# EAGLE board board (EAGLE 9.7.0)
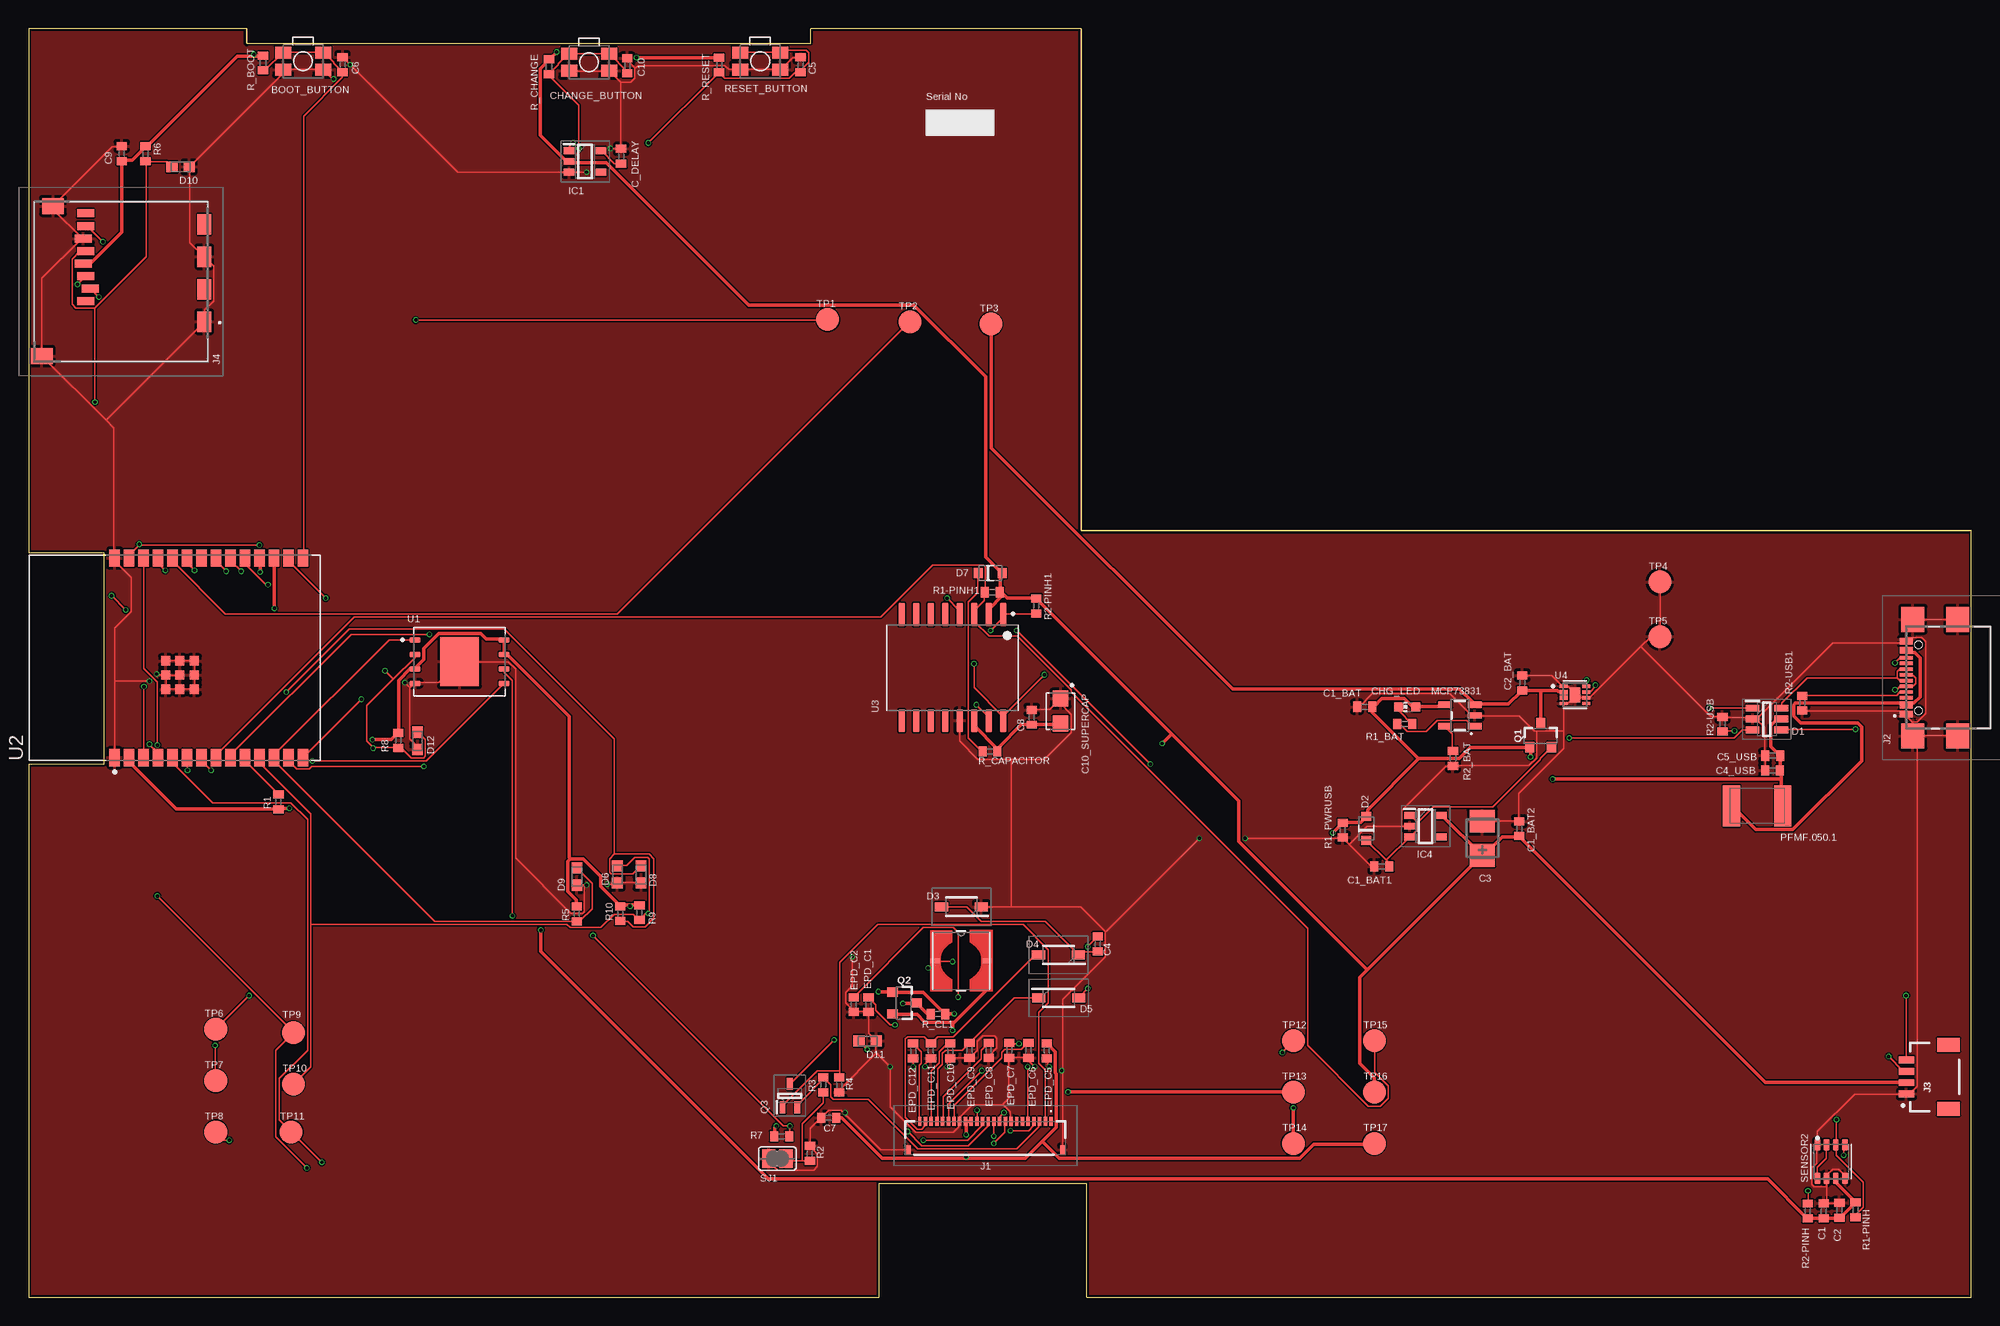
[diagram p0: board, top side]
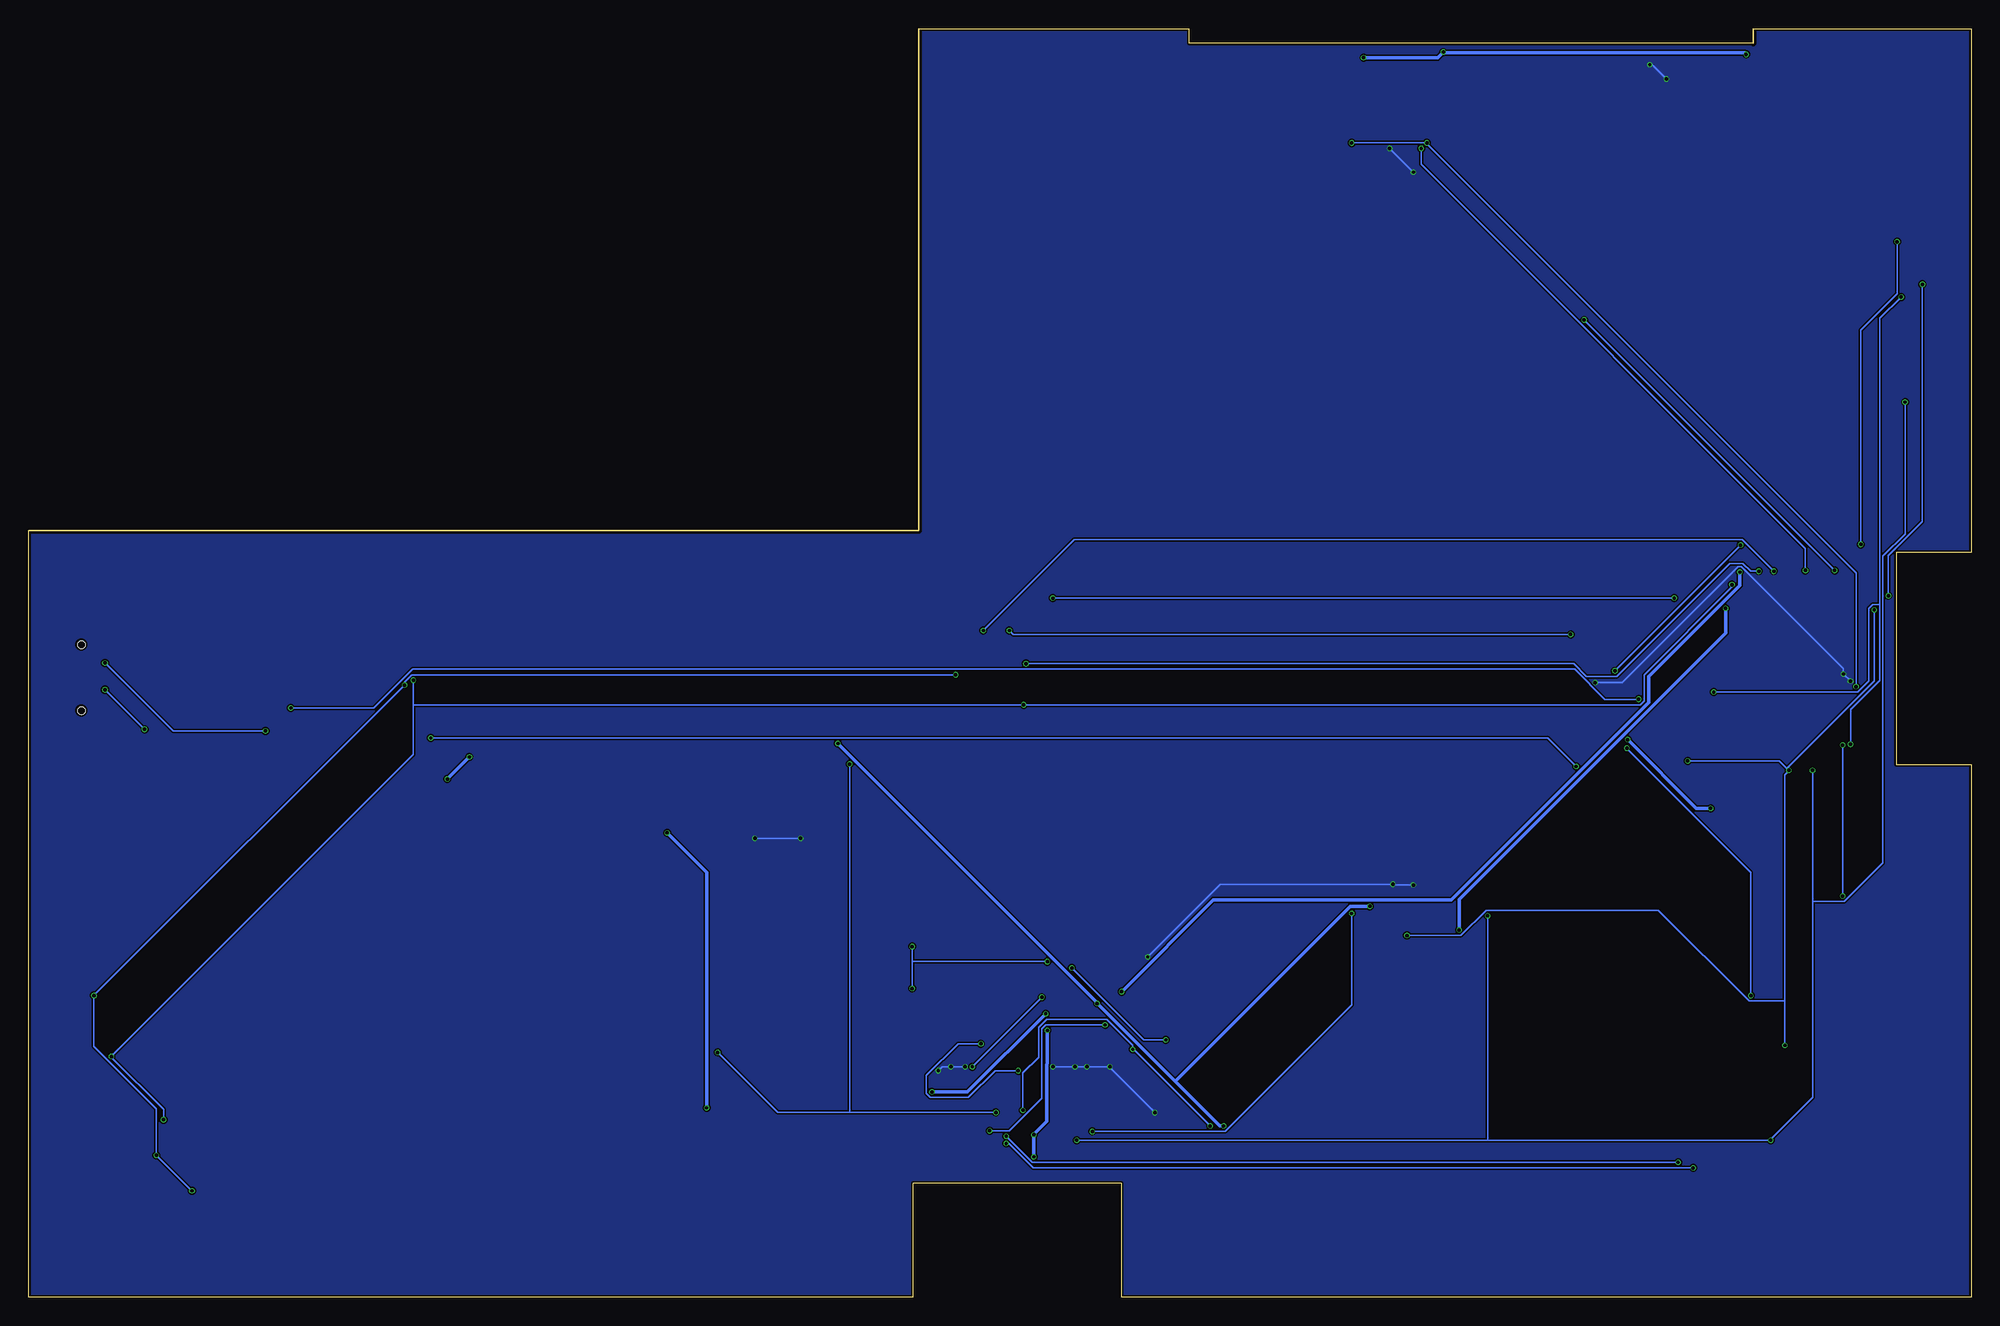
[diagram p1: board, bottom side, seen from below]

Size 170.2 x 111.2 mm. Coordinates in mm from the lower left corner, seen from the top.
Outline: 0,0 74.46,0 74.46,10 92.7,10 92.7,0 170.2,0 170.2,67.2 92.2,67.2 92.2,111.2 68.5,111.2 68.5,109.9 19.1,109.9 19.1,111.2 0,111.2 0,65.3 6.6,65.3 6.6,46.7 0,46.7 0,0
Copper layers (1*16): Top 0.035mm / dielectric 1.6mm / Bottom 0.035mm
Design rules "jlcpcb-2layers.dru *": minimum track width 0.15mm, minimum drill 0.3mm, track to track 5mil, track to pad 5mil, pad to pad 5mil, via to via 5mil, smd to smd 5mil, copper to edge 0.2mm, drill to drill 6mil, minimum pad ring 10mil, minimum via ring 3mil, stop-mask expansion 4mil, vias tented up to drill 0mil, thermal gap 10mil
Net classes: 1 netclass2: width 0.3 mm

## Footprints (pad centres in the part's own frame; a part is rotated, then mirrored left to right if it is on the bottom)
MYBUTTON = smd 1.4 x 1.05: 1 1.75,0.75; 2 -1.75,0.75; 3 -1.75,-0.75; 4 1.75,-0.75
ESP32_WROVER_EAGLE-LTSPICE_C0402 = smd 0.7 x 0.9: 1 -0.65,0; 2 0.65,0
EAGLE-LTSPICE_C0402 = smd 0.7 x 0.9: 1 -0.65,0; 2 0.65,0
RCL_CT3528 = smd 2 x 2.2: + -1.5,0; - 1.5,0
CAPCP3225X100N = smd 1.4 x 1.4: 1 -1.1,0; 2 1.1,0
ADAFRUIT_CHIP-LED0603 = smd 0.8 x 0.8: A 0,-0.75; C 0,0.75
SOT95P280X145-6N = smd 1.2 x 0.6: 1 -1.25,0.95; 2 -1.25,0; 3 -1.25,-0.95; 4 1.25,-0.95; 5 1.25,0; 6 1.25,0.95
ESP32_WROVER_AVX---SD0805S020S1R0_AVX_SD0805S020S1R0_0 = smd 0.8 x 0.9: 1 -1.05,0; 2 1.05,0
SOD3716X135N = smd 1.15 x 0.8: 1 -1.75,0; 2 1.75,0
DIOC1608X36N = smd 0.97 x 0.94: 1 -0.75,0; 2 0.75,0
SOT95P280X125-5N = smd 0.9 x 0.6: 1 -1.4,0.95; 2 -1.4,0; 3 -1.4,-0.95; 4 1.4,-0.95; 5 1.4,0.95
SOT95P280X120-5N = smd 0.9 x 0.6: 1 -1.4,0.95; 2 -1.4,0; 3 -1.4,-0.95; 4 1.4,-0.95; 5 1.4,0.95
FH34SRJ24S05SH99 = smd 0.3 x 0.8: 1 5.75,1.45; 2 5.25,1.45; 3 4.75,1.45; 4 4.25,1.45; 5 3.75,1.45; 6 3.25,1.45; 7 2.75,1.45; 8 2.25,1.45; 9 1.75,1.45; 10 1.25,1.45; 11 0.75,1.45; 12 0.25,1.45; 13 -0.25,1.45; 14 -0.75,1.45; 15 -1.25,1.45; 16 -1.75,1.45; 17 -2.25,1.45; 18 -2.75,1.45; 19 -3.25,1.45; 20 -3.75,1.45; 21 -4.25,1.45; 22 -4.75,1.45; 23 -5.25,1.45; 24 -5.75,1.45 | smd 0.4 x 0.8: MP1 6.75,-1.05; MP2 -6.75,-1.05
SAMACSYS_PARTS_USB4110GFA = smd 0.3 x 1.15: A1 -3.35,3.678; A4 -2.55,3.678; A5 -1.25,3.678; A6 -0.25,3.678; A7 0.25,3.678; A8 1.25,3.678; A9 2.55,3.678; A12 3.35,3.678; B1 3.05,3.678; B4 2.25,3.678; B5 1.75,3.678; B6 0.75,3.678; B7 -0.75,3.678; B8 -1.75,3.678; B9 -2.25,3.678; B12 -3.05,3.678 | smd 2.18 x 2: MP1 -5.11,-0.827; MP2 5.11,-0.827; MP3 -5.11,3.103; MP4 5.11,3.103 | hole 0.65: -2.89,2.603; 2.89,2.603
JST04_1MM_RA = smd 0.6 x 1.35: 1 -1.5,0; 2 -0.5,0; 3 0.5,0; 4 1.5,0 | smd 1.2 x 2: NC1 2.8,-3.675; NC2 -2.8,-3.675
112ATAARR03ATTEND = smd 1.8 x 1.2: G1 10.6,10.4; G2 4.9,10.4; S1 7.75,10.4; S2 2.05,10.4 | smd 1.4 x 1.9: G3 13.6,-3.85; G4 0.45,-2.85 | smd 0.7 x 1.5: P1 8.8,0; P2 7.7,0.4; P3 6.6,0; P4 5.5,-0.2; P5 4.4,0; P6 3.3,-0.2; P7 2.2,0; P8 1.1,0
IND_4828-WE-TPC_WRE = smd 0.813 x 0.406: 1 -2.286,0; 2 2.286,0
ESP32_WROVER_SPARKFUN-IC-POWER_SOT23-5 = smd 0.55 x 1.2: 1 -0.95,-1.3; 2 0,-1.3; 3 0.95,-1.3; 4 0.95,1.3; 5 -0.95,1.3
ESP32C6_VARISTOR_CT/CN1812 = smd 1.5 x 3.6: 1 -2.25,0; 2 2.25,0
ESP32_WROVER_SPARKFUN-DISCRETESEMI_SOT23-3 = smd 0.8 x 0.9: 1 -0.95,-1; 2 0.95,-1; 3 0,1.1
SOT65P210X110-3N = smd 1.05 x 0.5: 1 -1.05,0.65; 2 -1.05,-0.65; 3 1.05,0
ESP32_WROVER_EAGLE-LTSPICE_R0402 = smd 0.7 x 0.9: 1 -0.65,0; 2 0.65,0
ESP32_WROVER_BME680_PSON80P300X300X100-8N = smd 1.016 x 0.5: 1 1.458,1.2; 2 1.458,0.4; 3 1.458,-0.4; 4 1.458,-1.2; 5 -1.458,-1.22; 6 -1.458,-0.4; 7 -1.458,0.4; 8 -1.458,1.2
SJ = smd 1.168 x 1.6: 1 -0.762,0; 2 0.762,0
TP20R = smd 2 x 2: TP 0,0
SON127P600X800X80-9N = smd 0.94 x 0.44: 1 -3.895,1.905; 2 -3.895,0.635; 3 -3.895,-0.635; 4 -3.895,-1.905; 5 3.895,-1.905; 6 3.895,-0.635; 7 3.895,0.635; 8 3.895,1.905 | smd 3.4 x 4.3: 9 0,0
XCVR_ESP32-C6-WROOM-1-N8 = smd 1.5 x 0.9: 1 -8.75,5.26; 2 -8.75,3.99; 3 -8.75,2.72; 4 -8.75,1.45; 5 -8.75,0.18; 6 -8.75,-1.09; 7 -8.75,-2.36; 8 -8.75,-3.63; 9 -8.75,-4.9; 10 -8.75,-6.17; 11 -8.75,-7.44; 12 -8.75,-8.71; 13 -8.75,-9.98; 14 -8.75,-11.25; 15 8.75,-11.25; 16 8.75,-9.98; 17 8.75,-8.71; 18 8.75,-7.44; 19 8.75,-6.17; 20 8.75,-4.9; 21 8.75,-3.63; 22 8.75,-2.36; 23 8.75,-1.09; 24 8.75,0.18; 25 8.75,1.45; 26 8.75,2.72; 27 8.75,3.99; 28 8.75,5.26 | smd 0.8 x 0.8: 29_1 -2.755,0.79; 29_2 -1.505,0.79; 29_3 -0.255,0.79; 29_4 -2.755,-0.46; 29_5 -1.505,-0.46; 29_6 -0.255,-0.46; 29_7 -2.755,-1.71; 29_8 -1.505,-1.71; 29_9 -0.255,-1.71
SOIC127P1032X265-16N = smd 2.05 x 0.59: 1 -4.655,4.445; 2 -4.655,3.175; 3 -4.655,1.905; 4 -4.655,0.635; 5 -4.655,-0.635; 6 -4.655,-1.905; 7 -4.655,-3.175; 8 -4.655,-4.445; 9 4.655,-4.445; 10 4.655,-3.175; 11 4.655,-1.905; 12 4.655,-0.635; 13 4.655,0.635; 14 4.655,1.905; 15 4.655,3.175; 16 4.655,4.445
SON50P200X200X80-9N = smd 0.76 x 0.27: 1 -0.985,0.75; 4 -0.985,-0.75; 5 0.985,-0.75; 6 0.985,-0.25; 7 0.985,0.25; 8 0.985,0.75 | smd 0.813 x 0.406: 2 -0.985,0.25; 3 -0.985,-0.25 | smd 0.9 x 1.3: 9 0,0

## Placement (x,y rotation side)
BOOT_BUTTON  BUTTON_CUSYOMV1  [MYBUTTON]  24.05,108.35 180 top
C1  100nF  [ESP32_WROVER_EAGLE-LTSPICE_C0402]  157.26,7.59 90 top
C1_BAT  4.7uF  [ESP32_WROVER_EAGLE-LTSPICE_C0402]  117.04,51.76 180 top
C1_BAT1  4.7uF  [EAGLE-LTSPICE_C0402]  118.55,37.78 180 top
C1_BAT2  4.7uF  [EAGLE-LTSPICE_C0402]  130.59,41.08 90 top
C2  100nF  [ESP32_WROVER_EAGLE-LTSPICE_C0402]  158.63,7.64 90 top
C2_BAT  4.7uF  [ESP32_WROVER_EAGLE-LTSPICE_C0402]  130.85,53.86 90 top
C3  100uF TANT  [RCL_CT3528]  127.35,40.24 90 top
C4  4.7uF/25V  [EAGLE-LTSPICE_C0402]  93.66,30.98 90 top
C4_USB  100nF  [EAGLE-LTSPICE_C0402]  152.77,46.18 180 top
C5  1uF  [ESP32_WROVER_EAGLE-LTSPICE_C0402]  67.63,108.02 90 top
C5_USB  4.7uF  [EAGLE-LTSPICE_C0402]  152.78,47.48 180 top
C6  100nF  [ESP32_WROVER_EAGLE-LTSPICE_C0402]  27.51,108.04 90 top
C7  10uF  [EAGLE-LTSPICE_C0402]  70.1,15.74 180 top
C8  100nF  [EAGLE-LTSPICE_C0402]  87.89,50.84 90 top
C9  100nF  [EAGLE-LTSPICE_C0402]  8.17,100.24 90 top
C10  100nF  [ESP32_WROVER_EAGLE-LTSPICE_C0402]  52.45,107.94 90 top
C10_SUPERCAP  CPH3225A  [CAPCP3225X100N]  90.4,51.39 270 top
C_DELAY  100nF  [ESP32_WROVER_EAGLE-LTSPICE_C0402]  51.91,100 90 top
CHANGE_BUTTON  BUTTON_CUSYOMV1  [MYBUTTON]  49.1,108.23 180 top
CHG_LED  [ADAFRUIT_CHIP-LED0603]  120.78,51.75 90 top
D1  USBLC6-2SC6Y  [SOT95P280X145-6N]  152.28,50.68 0 top
D2  SD0805S020S1R0  [ESP32_WROVER_AVX---SD0805S020S1R0_AVX_SD0805S020S1R0_0]  117.19,41.09 90 top
D3  MBR0530  [SOD3716X135N]  81.72,34.24 180 top
D4  MBR0530  [SOD3716X135N]  90.22,30.03 180 top
D5  MBR0530  [SOD3716X135N]  90.25,26.26 0 top
D6  PGB1010603MR  [DIOC1608X36N]  51.58,37.08 90 top
D7  SD0805S020S1R0  [ESP32_WROVER_AVX---SD0805S020S1R0_AVX_SD0805S020S1R0_0]  84.24,63.49 0 top
D8  PGB1010603MR  [DIOC1608X36N]  53.66,37.08 90 top
D9  PGB1010603MR  [DIOC1608X36N]  48.04,36.88 90 top
D10  PGB1010603MR  [DIOC1608X36N]  13.32,99.08 180 top
D11  PGB1010603MR  [DIOC1608X36N]  73.5,22.48 180 top
D12  PGB1010603MR  [DIOC1608X36N]  34.08,48.78 90 top
EPD_C1  1uF/50V  [ESP32_WROVER_EAGLE-LTSPICE_C0402]  73.58,25.66 90 top
EPD_C2  1uF/50V  [ESP32_WROVER_EAGLE-LTSPICE_C0402]  72.29,25.66 90 top
EPD_C5  0.1uF/50V  [ESP32_WROVER_EAGLE-LTSPICE_C0402]  89.2,21.62 90 top
EPD_C6  1uF/50V  [ESP32_WROVER_EAGLE-LTSPICE_C0402]  87.6,21.66 90 top
EPD_C7  1uF/50V  [ESP32_WROVER_EAGLE-LTSPICE_C0402]  85.91,21.66 90 top
EPD_C8  1uF/50V  [ESP32_WROVER_EAGLE-LTSPICE_C0402]  84.12,21.66 90 top
EPD_C9  1uF/50V  [ESP32_WROVER_EAGLE-LTSPICE_C0402]  82.43,21.66 90 top
EPD_C10  1uF/50V  [ESP32_WROVER_EAGLE-LTSPICE_C0402]  80.75,21.6 90 top
EPD_C11  1uF/50V  [ESP32_WROVER_EAGLE-LTSPICE_C0402]  79.05,21.62 90 top
EPD_C12  1uF/50V  [ESP32_WROVER_EAGLE-LTSPICE_C0402]  77.49,21.6 90 top
IC1  BD5229G-TR  [SOT95P280X125-5N]  48.75,99.55 0 top
IC4  XC6220A331MR-G  [SOT95P280X120-5N]  122.38,41.3 0 top
J1  FH34SRJ-24S-0.5SH_99_  [FH34SRJ24S05SH99]  83.82,13.97 0 top
J2  SAMACSYS_PARTS_USB4110-GF-A  [SAMACSYS_PARTS_USB4110GFA]  168.17,54.31 90 top
J3  QWIIC_RIGHT_ANGLE  [JST04_1MM_RA]  164.51,19.33 90 top
J4  112A-TAAR-R03_ATTEND  [112ATAARR03ATTEND]  5,96.1 270 top
L1  68uH  [IND_4828-WE-TPC_WRE]  81.7,29.5 0 top
MCP73831  ESP32_WROVER_SPARKFUN-IC-POWER_MCP73831  [ESP32_WROVER_SPARKFUN-IC-POWER_SOT23-5]  125.38,51 90 top
PFMF.050.1  ESP32C6_VARISTORCN1812  [ESP32C6_VARISTOR_CT/CN1812]  151.43,43.08 0 top
Q1  20V/4.2A/52mΩ/1.4W  [ESP32_WROVER_SPARKFUN-DISCRETESEMI_SOT23-3]  132.46,49.21 0 top
Q2  20V/4.2A/52mΩ/1.4W  [ESP32_WROVER_SPARKFUN-DISCRETESEMI_SOT23-3]  76.68,25.81 270 top
Q3  SI1308EDL-T1-GE3  [SOT65P210X110-3N]  66.69,17.69 90 top
R1  10K  [ESP32_WROVER_EAGLE-LTSPICE_R0402]  21.89,43.42 90 top
R1-PINH  10K  [ESP32_WROVER_EAGLE-LTSPICE_R0402]  160.05,7.68 90 top
R1-PINH1  10K  [ESP32_WROVER_EAGLE-LTSPICE_R0402]  84.43,61.8 359.7 top
R1_BAT  200  [ESP32_WROVER_EAGLE-LTSPICE_R0402]  120.56,50.26 180 top
R1_PWRUSB  100K  [ESP32_WROVER_EAGLE-LTSPICE_R0402]  115.12,40.95 90 top
R2  2.2  [ESP32_WROVER_EAGLE-LTSPICE_R0402]  68.45,12.62 270 top
R2-PINH  10K  [ESP32_WROVER_EAGLE-LTSPICE_R0402]  155.86,7.58 270 top
R2-PINH1  10K  [ESP32_WROVER_EAGLE-LTSPICE_R0402]  88.27,60.6 90 top
R2-USB  5k1  [ESP32_WROVER_EAGLE-LTSPICE_R0402]  148.39,50.24 90 top
R2-USB1  5k1  [ESP32_WROVER_EAGLE-LTSPICE_R0402]  155.37,52.08 90 top
R2_BAT  2K  [ESP32_WROVER_EAGLE-LTSPICE_R0402]  124.78,47.24 90 top
R3  0.47  [ESP32_WROVER_EAGLE-LTSPICE_R0402]  69.62,18.64 90 top
R4  10K  [ESP32_WROVER_EAGLE-LTSPICE_R0402]  71.01,18.62 270 top
R5  10K  [ESP32_WROVER_EAGLE-LTSPICE_R0402]  48.03,33.62 90 top
R6  10K  [ESP32_WROVER_EAGLE-LTSPICE_R0402]  10.25,100.22 90 top
R7  10K  [ESP32_WROVER_EAGLE-LTSPICE_R0402]  65.97,14.12 180 top
R8  10K  [ESP32_WROVER_EAGLE-LTSPICE_R0402]  32.39,48.82 90 top
R9  10K  [ESP32_WROVER_EAGLE-LTSPICE_R0402]  53.51,33.72 90 top
R10  10K  [ESP32_WROVER_EAGLE-LTSPICE_R0402]  51.84,33.64 90 top
R_BOOT  10K  [ESP32_WROVER_EAGLE-LTSPICE_R0402]  20.54,108.18 90 top
R_CAPACITOR  15  [ESP32_WROVER_EAGLE-LTSPICE_R0402]  84.22,47.85 0.3 top
R_CHANGE  10K  [ESP32_WROVER_EAGLE-LTSPICE_R0402]  45.59,107.85 90 top
R_CL1  10K  [ESP32_WROVER_EAGLE-LTSPICE_R0402]  79.67,24.84 180 top
R_RESET  10K  [ESP32_WROVER_EAGLE-LTSPICE_R0402]  60.49,108 90 top
RESET_BUTTON  BUTTON_CUSYOMV1  [MYBUTTON]  64.09,108.35 180 top
SENSOR2  BME688  [ESP32_WROVER_BME680_PSON80P300X300X100-8N]  157.91,11.91 90 top
SJ1  [SJ]  65.6,12.17 0 top
TP1  TPTP20R  [TP20R]  70,85.7 0 top
TP2  TPTP20R  [TP20R]  77.2,85.5 0 top
TP3  TPTP20R  [TP20R]  84.3,85.3 0 top
TP4  TPTP20R  [TP20R]  142.9,62.7 0 top
TP5  TPTP20R  [TP20R]  142.9,57.9 0 top
TP6  TPTP20R  [TP20R]  16.4,23.5 0 top
TP7  TPTP20R  [TP20R]  16.4,19 0 top
TP8  TPTP20R  [TP20R]  16.4,14.5 0 top
TP9  TPTP20R  [TP20R]  23.2,23.2 0 top
TP10  TPTP20R  [TP20R]  23.2,18.7 0 top
TP11  TPTP20R  [TP20R]  23,14.5 0 top
TP12  TPTP20R  [TP20R]  110.8,22.5 0 top
TP13  TPTP20R  [TP20R]  110.8,18 0 top
TP14  TPTP20R  [TP20R]  110.8,13.5 0 top
TP15  TPTP20R  [TP20R]  117.9,22.5 0 top
TP16  TPTP20R  [TP20R]  117.9,18 0 top
TP17  TPTP20R  [TP20R]  117.9,13.5 0 top
U1  W25Q512JVEIQ  [SON127P600X800X80-9N]  37.76,55.72 0 top
U2  ESP32-C6-WROOM-1-N8  [XCVR_ESP32-C6-WROOM-1-N8]  12.8,56.05 90 top
U3  DS3231SN#  [SOIC127P1032X265-16N]  80.94,55.2 270 top
U4  MAX17048G+T10  [SON50P200X200X80-9N]  135.47,52.8 0 top

## Library data of the parts
BOOT_BUTTON CHANGE_BUTTON CHG_LED PFMF.050.1 RESET_BUTTON SJ1 = DeskAssistant v19 v1
C1 C1_BAT C1_BAT1 C1_BAT2 C2 C2_BAT C4 C4_USB C5 C5_USB C6-C10 C_DELAY EPD_C1 EPD_C2 EPD_C5-EPD_C12 = DeskAssistant v19 v1; SPICEMODEL: NONE; SPICEPREFIX: C
C3 = DeskAssistant v19 v1; SPICEPREFIX: C
C10_SUPERCAP = DeskAssistant v19 v1; AVAILABILITY: Not in stock; CHECK_PRICES: https://www.snapeda.com/parts/CPH3225A/Seiko+Instruments/view-part/?ref=eda; DESCRIPTION: 11 mF (EDLC) Supercapacitor 3.3 V 1210 (3225 Metric) - -; MF: Seiko Instruments; MP: CPH3225A; PACKAGE: 1210 Seiko; PRICE: None; PURCHASE-URL: https://www.snapeda.com/api/url_track_click_mouser/?unipart_id=562593&manufacturer=Seiko Instruments&part_name=CPH3225A&search_term=None; SNAPEDA_LINK: https://www.snapeda.com/parts/CPH3225A/Seiko+Instruments/view-part/?ref=snap
D1 = DeskAssistant v19 v1; AVAILABILITY: In Stock; CHECK_PRICES: https://www.snapeda.com/parts/USBLC6-2SC6Y/STMicroelectronics/view-part/?ref=eda; DESCRIPTION: 17V Clamp 5A (8/20µs) Ipp Tvs Diode Surface Mount SOT-23-6; MF: STMicroelectronics; MP: USBLC6-2SC6Y; PACKAGE: SOT-23-6 STMicroelectronics; PRICE: None; SNAPEDA_LINK: https://www.snapeda.com/parts/USBLC6-2SC6Y/STMicroelectronics/view-part/?ref=snap
D2 D7 = DeskAssistant v19 v1; CENTROID_NOT_SPECIFIED: No; DATASHEET: http://datasheets.avx.com/schottky.pdf; DIGIKEY_DESCRIPTION: DIODE SCHOTTKY 20V 1A 0805; DIGIKEY_PART_NUMBER: 478-7800-1-ND; LEAD_FREE: yes; MF: AVX; MOUSER_PART_NUMBER: 581-SD0805S020S1R0; PACKAGE: 0805 (2012 metric); PREFIX: D; ROHS: yes; TEMPERATURE_RANGE_HIGH: +125°C; TEMPERATURE_RANGE_LOW: -55°C
D3-D5 = DeskAssistant v19 v1; AVAILABILITY: In Stock; CHECK_PRICES: https://www.snapeda.com/parts/MBR0530/Onsemi/view-part/?ref=eda; DESCRIPTION: Diode Schottky 30 V 500mA Surface Mount SOD-123; MF: ON Semiconductor; MP: MBR0530; PACKAGE: SOD-123-2 ON Semiconductor; PRICE: None; PURCHASE-URL: https://www.snapeda.com/api/url_track_click_mouser/?unipart_id=179458&manufacturer=ON Semiconductor&part_name=MBR0530&search_term=None; SNAPEDA_LINK: https://www.snapeda.com/parts/MBR0530/Onsemi/view-part/?ref=snap
D6 D8-D12 = DeskAssistant v19 v1; AVAILABILITY: In Stock; CHECK_PRICES: https://www.snapeda.com/parts/PGB1010603MR/Littelfuse/view-part/?ref=eda; DESCRIPTION: 150V (Typ) Clamp - Ipp Tvs Diode Surface Mount 0603 (1608 Metric); MF: Littelfuse Inc.; MP: PGB1010603MR; PACKAGE: 0603 Littelfuse Inc.; PRICE: None; PURCHASE-URL: https://www.snapeda.com/api/url_track_click_mouser/?unipart_id=5659453&manufacturer=Littelfuse Inc.&part_name=PGB1010603MR&search_term=None; SNAPEDA_LINK: https://www.snapeda.com/parts/PGB1010603MR/Littelfuse/view-part/?ref=snap
IC1 = DeskAssistant v19 v1; DESCRIPTION: Voltage Detector with Adjustable Delay Time: CMOS processes are utilized to develop high precision, low current consumption CMOS reset ICs that allow arbitrary setting of the delay time. The extensive lineup includes both Nch Open Drain and CMOS output types in a wide range of detection voltages (from 2.3V to 6.0V, in 0.1V steps), enabling selection of the ideal solution based on customer requirements. In addition, the entire series is of course both lead-free and RoHS-compliant.; HEIGHT: 1.25mm; MANUFACTURER_NAME: ROHM Semiconductor; MANUFACTURER_PART_NUMBER: BD5229G-TR; MOUSER_PART_NUMBER: 755-BD5229G-TR; MOUSER_PRICE-STOCK: https://www.mouser.co.uk/ProductDetail/ROHM-Semiconductor/BD5229G-TR?qs=4kLU8WoGk0vvnhrrYwdszw%3D%3D
IC4 = DeskAssistant v19 v1; DESCRIPTION: LDO Voltage Regulators; HEIGHT: 1.2mm; MANUFACTURER_NAME: Torex; MANUFACTURER_PART_NUMBER: XC6220A331MR-G; MOUSER_PART_NUMBER: 865-XC6220A331MR-G; MOUSER_PRICE-STOCK: https://www.mouser.co.uk/ProductDetail/Torex-Semiconductor/XC6220A331MR-G?qs=AsjdqWjXhJ8ZSWznL1J0gg%3D%3D
J1 = DeskAssistant v19 v1; DESCRIPTION: 24 Position FFC, FPC Connector Contacts, Top and Bottom 0.020" (0.50mm) Surface Mount, Right Angle; HEIGHT: 1.1mm; MANUFACTURER_NAME: Hirose; MANUFACTURER_PART_NUMBER: FH34SRJ-24S-0.5SH(99); MOUSER_PART_NUMBER: 798-FH34SRJ24S05SH99; MOUSER_PRICE-STOCK: https://www.mouser.co.uk/ProductDetail/Hirose-Connector/FH34SRJ-24S-0.5SH99?qs=vcbW%252B4%252BSTIpKBl5ap9J8Fw%3D%3D
J2 = DeskAssistant v19 v1; DESCRIPTION: CONN USB 2.0 TYPE-C R/A SMT; HEIGHT: 3.26mm; MANUFACTURER_NAME: GCT (GLOBAL CONNECTOR TECHNOLOGY); MANUFACTURER_PART_NUMBER: USB4110-GF-A; MOUSER_PART_NUMBER: 640-USB4110-GF-A; MOUSER_PRICE-STOCK: https://www.mouser.co.uk/ProductDetail/GCT/USB4110-GF-A?qs=KUoIvG%2F9IlYiZvIXQjyJeA%3D%3D
J3 = DeskAssistant v19 v1; PROD_ID: CONN-13694
J4 = DeskAssistant v19 v1; DESCRIPTION: Micro SD Card Socket, Push-Push Type, Top Mount, SMT, H=1.83mm, 10u; HEIGHT: 1.9mm; MANUFACTURER_NAME: ATTEND; MANUFACTURER_PART_NUMBER: 112A-TAAR-R03 ATTEND
L1 = DeskAssistant v19 v1; COPYRIGHT: Copyright (C) 2024 Ultra Librarian. All rights reserved.; MANUFACTURER_PART_NUMBER: 744043680; MFR_NAME: Wurth Electronics
MCP73831 = DeskAssistant v19 v1; PROD_ID: IC-09995
Q1 Q2 = DeskAssistant v19 v1; PROD_ID: TRAN-14388
Q3 = DeskAssistant v19 v1; AVAILABILITY: In Stock; CHECK_PRICES: https://www.snapeda.com/parts/SI1308EDL-T1-GE3/Vishay+Siliconix/view-part/?ref=eda; DESCRIPTION: Si1308EDL-T1-GE3 N-channel MOSFET Transistor, 1.5 A, 30 V, 3-Pin SC-70 | Siliconix / Vishay SI1308EDL-T1-GE3; MF: Vishay Siliconix; MP: SI1308EDL-T1-GE3; PACKAGE: SOT-323 Vishay Semiconductor; PRICE: None; PURCHASE-URL: https://www.snapeda.com/api/url_track_click_mouser/?unipart_id=274603&manufacturer=Vishay Siliconix&part_name=SI1308EDL-T1-GE3&search_term=None; SNAPEDA_LINK: https://www.snapeda.com/parts/SI1308EDL-T1-GE3/Vishay+Siliconix/view-part/?ref=snap
R1 R1-PINH R1-PINH1 R1_BAT R1_PWRUSB R2 R2-PINH R2-PINH1 R2-USB R2-USB1 R2_BAT R3-R10 R_BOOT R_CAPACITOR R_CHANGE R_CL1 R_RESET = DeskAssistant v19 v1; SPICEMODEL: NONE; SPICEPREFIX: R
SENSOR2 = DeskAssistant v19 v1; AVAILABILITY: Unavailable; DESCRIPTION: Integrated Environmental Unit; MF: Bosch Sensortec; MP: BME680; PACKAGE: LGA-8 Bosch Tools; PRICE: None
TP1-TP17 = bib_nou
U1 = DeskAssistant v19 v1; AVAILABILITY: In Stock; CHECK_PRICES: https://www.snapeda.com/parts/W25Q512JVEIQ/Winbond+Electronics/view-part/?ref=eda; DESCRIPTION: FLASH - NOR Memory IC 512Mb (64M x 8) SPI - Quad I/O 133 MHz 8-WSON (8x6); MF: Winbond Electronics; MP: W25Q512JVEIQ; PACKAGE: Package; PRICE: None; SNAPEDA_LINK: https://www.snapeda.com/parts/W25Q512JVEIQ/Winbond+Electronics/view-part/?ref=snap
U2 = DeskAssistant v19 v1; AVAILABILITY: In Stock; CHECK_PRICES: https://www.snapeda.com/parts/ESP32-C6-WROOM-1-N8/Espressif+Systems/view-part/?ref=eda; DESCRIPTION: Multiprotocol Modules ESP32-C6 module, Wi-Fi 6 in 2.4 GHz band, Bluetooth 5, Zigbee 3.0 and Thread. ESP34-WROOM Compatible - ENGINEERING SAMPLE; MF: Espressif Systems; MP: ESP32-C6-WROOM-1-N8; PACKAGE: None; PRICE: None; SNAPEDA_LINK: https://www.snapeda.com/parts/ESP32-C6-WROOM-1-N8/Espressif+Systems/view-part/?ref=snap
U3 = DeskAssistant v19 v1; AVAILABILITY: In Stock; CHECK_PRICES: https://www.snapeda.com/parts/DS3231SN%23/Analog+Devices/view-part/?ref=eda; DESCRIPTION: Extremely Accurate I²C-Integrated RTC/TCXO/Crystal; MF: Analog Devices; MP: DS3231SN#; PACKAGE: SOIC-16 Maxim; PRICE: None; PURCHASE-URL: https://www.snapeda.com/api/url_track_click_mouser/?unipart_id=99048&manufacturer=Analog Devices&part_name=DS3231SN#&search_term=None; SNAPEDA_LINK: https://www.snapeda.com/parts/DS3231SN%23/Analog+Devices/view-part/?ref=snap
U4 = DeskAssistant v19 v1; AVAILABILITY: In Stock; CHECK_PRICES: https://www.snapeda.com/parts/MAX17048G+T10/Analog+Devices/view-part/?ref=eda; DESCRIPTION: 3µA 1-Cell/2-Cell Fuel Gauge with ModelGauge; MF: Analog Devices; MP: MAX17048G+T10; PACKAGE: TDFN-8 Maxim; PRICE: None; PURCHASE-URL: https://www.snapeda.com/api/url_track_click_mouser/?unipart_id=329239&manufacturer=Analog Devices&part_name=MAX17048G+T10&search_term=None; SNAPEDA_LINK: https://www.snapeda.com/parts/MAX17048G+T10/Analog+Devices/view-part/?ref=snap

## Nets
3V3 [netclass2]: C1_BAT2.1 C3.+ C9.1 D7.2 IC1.2 IC4.5 J3.2 J4.P4 Q2.3 R1-PINH1.2 R1.1 R2-PINH1.2 R5.2 R6.2 R7.2 R8.2 R9.2 R10.2 R_BOOT.2 R_CHANGE.2 R_CL1.2 R_RESET.2 TP16.TP U1.3 U1.7 U1.8 U2.2 U3.2
32KHZ: R2-PINH1.1 U2.9 U3.1
DN: D1.4 J2.A7 J2.B7
DP: D1.6 J2.A6 J2.B6
EPD_3V3 [netclass2]: C7.1 EPD_C5.2 J1.15 J1.16 L1.2 Q2.2 TP17.TP
EPD_3V3_C [netclass2]: Q2.1 R_CL1.1 TP13.TP U2.18
EPD_BUSY: J1.9 TP9.TP U2.26
EPD_CS: D6.2 J1.12 R9.1 TP10.TP U2.11
EPD_DC: J1.11 TP11.TP U2.5
EPD_RST: J1.10 TP12.TP U2.21
FLASH_CS: D9.2 R5.1 U1.1 U2.12
GDR: J1.2 Q3.1 R4.1
GND: BOOT_BUTTON.1 BOOT_BUTTON.2 C1.2 C1_BAT1.2 C1_BAT2.2 C1_BAT.2 C2.2 C2_BAT.2 C3.- C4_USB.2 C5.2 C5_USB.2 C6.2 C7.2 C8.2 C9.2 C10.2 C10_SUPERCAP.1 C_DELAY.2 CHANGE_BUTTON.1 CHANGE_BUTTON.2 D1.2 D3.1 D6.1 D8.1 D9.1 D10.1 D11.1 D12.1 EPD_C1.1 EPD_C2.1 EPD_C5.1 EPD_C6.1 EPD_C7.1 EPD_C8.1 EPD_C9.1 EPD_C10.1 EPD_C11.1 EPD_C12.1 IC1.3 IC4.2 J1.8 J1.17 J1.MP1 J1.MP2 J2.A1 J2.A12 J2.B1 J2.B12 J2.MP1 J2.MP2 J2.MP3 J2.MP4 J3.1 J4.G1 J4.G2 J4.G3 J4.G4 J4.P6 MCP73831.2 R1_PWRUSB.1 R2-USB1.1 R2-USB.2 R2.1 R2_BAT.1 R4.2 RESET_BUTTON.1 RESET_BUTTON.2 SENSOR2.1 SENSOR2.5 SENSOR2.7 SJ1.1 TP4.TP TP5.TP U1.4 U1.9 U2.1 U2.28 U2.29_1 U2.29_2 U2.29_3 U2.29_4 U2.29_5 U2.29_6 U2.29_7 U2.29_8 U2.29_9 U3.13 U4.1 U4.4 U4.6 U4.9
GPIO8: R1.2 U2.10
I2C_PW [netclass2]: C1.1 C2.1 R1-PINH.2 R2-PINH.2 SENSOR2.6 U2.17
INT_RTC: R1-PINH1.1 TP15.TP U2.8 U3.3
IO/BOOT: BOOT_BUTTON.3 BOOT_BUTTON.4 C6.1 R_BOOT.1 U2.15
IO/CHANGE: C10.1 CHANGE_BUTTON.3 CHANGE_BUTTON.4 R_CHANGE.1 U2.23
MISO: D12.2 J4.P7 R8.1 TP6.TP U1.2 U2.27
MOSI: D11.2 J1.14 J4.P3 R7.1 TP7.TP U1.5 U2.7
N$1: J2.A5 R2-USB1.2
N$2: C1_BAT1.1 D2.1 IC4.1 IC4.3 Q1.2
N$3: MCP73831.1 R1_BAT.2
N$4: CHG_LED.C R1_BAT.1
N$5: J2.B5 R2-USB.1
N$6: MCP73831.5 R2_BAT.2
N$7: C4.1 D3.2 D4.1
N$8: EPD_C6.2 J1.18
N$9: C_DELAY.1 IC1.5
N$10: EPD_C8.2 J1.20
N$11: EPD_C7.2 J1.19
N$12: EPD_C1.2 J1.4
N$13: EPD_C10.2 J1.22
N$14: EPD_C2.2 J1.5
N$15: EPD_C12.2 J1.24
N$16: SENSOR2.2 SENSOR2.8
N$19: D7.1 R_CAPACITOR.1
PREVGH: D5.1 EPD_C9.2 J1.21
PREVGL: D4.2 EPD_C11.2 J1.23
RESE: J1.3 Q3.2 R3.2
RESE': R2.2 R3.1 SJ1.2
RESET: C5.1 IC1.1 R_RESET.1 RESET_BUTTON.3 RESET_BUTTON.4 U2.3
RTC_RST: U2.16 U3.4
RX: TP2.TP U2.24
SCK: D10.2 J1.13 J4.P5 R6.1 TP8.TP U1.6 U2.6
SCL: J3.4 R2-PINH.1 SENSOR2.4 U2.20 U3.16 U4.7
SDA: J3.3 R1-PINH.1 SENSOR2.3 U2.19 U3.15 U4.8
SRC: C4.2 D5.2 L1.1 Q3.3
SS_SD: D8.2 J4.P2 R10.1 U2.4
TX: TP1.TP U2.25
USB_D+: D1.1 U2.14
USB_D-: D1.3 U2.13
VBAT [netclass2]: C2_BAT.1 MCP73831.3 Q1.3 TP3.TP U4.2 U4.3
VBUS [netclass2]: C1_BAT.1 C4_USB.1 C5_USB.1 CHG_LED.A D1.5 D2.2 MCP73831.4 PFMF.050.1.2 Q1.1 R1_PWRUSB.2 TP14.TP
VRTC [netclass2]: C8.1 C10_SUPERCAP.2 R_CAPACITOR.2 U3.14
VUSB [netclass2]: J2.A4 J2.A9 J2.B4 J2.B9 PFMF.050.1.1

## Tracks (layer width: path | path; a pad name or v marks a point on that pad's centre or on a via)
3V3  (via drill 0.3)
  Top 0.3: v65.51,15.03 65.37,14.89 65.37,14.13 R7.2 | v76.59,25.76 77.77,25.76 Q2.3 77.91,25.69 78.74,24.86 79.01,24.86 R_CL1.2 | U2.2 8.86,47.3 8.86,46.88 12.95,42.8 21.88,42.8 R1.1 22.02,42.87 v22.85,42.87 | 47.44,38.43 47.23,38.23 47.23,35.59 47.99,34.83 47.99,34.28 R5.2 | 47.44,38.43 48.61,38.43 50.14,36.91 50.14,36.01 51.8,34.35 R10.2 51.94,34.42 52.7,34.42 | 52.7,34.42 53.46,34.42 R9.2 | 47.44,38.43 47.37,38.57 47.37,50.9 41.83,56.44 U1.7 41.69,56.37 41.69,57.62 U1.8 41.55,57.69 40.1,57.69 39.61,58.17 35.94,58.17 34.62,56.85 34.62,55.88 33.93,55.19 U1.3 33.86,55.05 33.38,55.05 32.41,54.08 32.41,49.51 R8.2 32.27,49.38 31.79,48.89 v30.12,48.89 | v52.7,34.28 52.7,34.42 | v53.25,108.65 60.45,108.65 R_RESET.2 | v46.26,109.14 45.7,108.58 R_CHANGE.2 45.57,108.44 44.8,107.68 44.8,101.87 47.09,99.58 47.3,99.58 IC1.2 47.44,99.44 50.62,99.44 63.09,86.98 77.56,86.98 83.86,80.68 83.86,64.89 85.18,63.57 D7.2 85.25,63.43 85.11,63.29 85.11,61.84 R1-PINH1.2 | 19.74,108.79 18.28,108.79 10.39,100.9 R6.2 10.25,100.83 9.07,99.65 8.17,99.65 C9.1 8.17,99.44 8.17,93.35 5.47,90.65 4.85,90.65 J4.P4 | 19.74,108.79 20.5,108.79 R_BOOT.2 | v19.74,108.93 19.74,108.79 | R1-PINH1.2 85.25,61.77 85.73,61.29 88.22,61.29 R2-PINH1.2 88.36,61.15 100.14,49.38 | U3.2 84.14,59.9 84.14,60.32 85.32,61.49 R1-PINH1.2 | IC4.5 123.82,42.24 127.28,38.78 C3.+ | C3.+ 127.49,38.78 129.08,40.37 130.54,40.37 C1_BAT2.1 130.68,40.3 152.14,18.84 164.47,18.84 J3.2 | 117.28,28.7 127.21,38.64 C3.+ | 117.28,28.7 116.62,28.05 116.62,20.5 117.86,19.25 117.86,18 TP16.TP | 100.14,49.38 106.02,43.49 106.02,39.96 117.28,28.7
  Top 0.3: 100.14,49.38 v99.31,48.54
  Bottom 0.3: v65.51,15.03 65.86,15.03 69.77,18.94 | 69.77,18.94 v76.59,25.76 76.66,25.9 v99.31,48.54 | v22.85,42.87 24.1,42.87 v30.12,48.89 | 69.77,18.94 54.43,34.28 v52.7,34.28 | v53.25,108.65 46.74,108.65 v46.26,109.14 46.12,109.07 19.88,109.07 v19.74,108.93
32KHZ  (via drill 0.3)
  Top 0.15: R2-PINH1.1 88.22,59.9 85.39,59.9 U3.1 85.32,59.83 85.32,59.49 v84.28,58.45 | v35.11,58.1 28.25,58.1 17.73,47.58 17.73,47.37 U2.9
  Bottom 0.15: v35.11,58.1 83.93,58.1 v84.28,58.45
DN  (via drill 0.3)
  Top 0.15: J2.A7 164.54,54.5 165.09,54.5 165.3,54.29 165.3,53.81 165.09,53.6 164.54,53.6 J2.B7 164.47,53.53 163.91,53.53 163.64,53.25 v163.5,53.25 | v160.04,49.79 153.6,49.79 D1.4
  Bottom 0.15: v163.5,53.25 v160.04,49.79
DP
  Top 0.15: 163.71,54.29 163.91,54.08 164.47,54.08 J2.A6 | 163.71,54.29 163.71,54.85 163.91,55.05 164.47,55.05 J2.B6 | 163.71,54.29 155.81,54.29 153.6,52.08 153.6,51.66 D1.6
EPD_3V3  (via drill 0.3)
  Top 0.3: 80.95,24.1 81.09,24.1 83.93,26.94 83.93,29.43 L1.2 | 80.95,24.1 78.53,24.1 77.84,24.79 75.69,24.79 Q2.2 | J1.15 82.55,15.44 82.13,15.44 J1.16 82.13,15.3 v82.13,14.27 | 82.13,12.19 87.32,12.19 88.81,13.68 | 82.13,12.19 74.79,12.19 71.26,15.72 70.77,15.72 C7.1 | 88.81,13.68 90.03,14.89 90.03,19.6 89.96,19.67 89.96,21.54 89.26,22.23 EPD_C5.2 | v82.13,12.33 82.13,12.19 | 88.81,13.68 90.3,12.19 111.35,12.19 112.6,13.43 117.86,13.43 TP17.TP | v80.95,23.41 80.95,24.1
  Bottom 0.3: v82.13,12.33 v82.13,14.27 82.06,14.4 81.02,15.44 81.02,20.43 80.95,20.5 v80.95,23.41
EPD_3V3_C  (via drill 0.3)
  Top 0.3: v20.29,63.57 20.29,64.75 U2.18 | v74.44,26.8 75.55,26.8 Q2.1 75.69,26.73 78.39,26.73 80.26,24.86 R_CL1.1 80.47,24.86 v81.09,24.86 | v91.06,18 TP13.TP
  Bottom 0.3: v20.29,63.57 20.29,62.39 28.25,54.43 28.25,52.15 45.57,34.83 66.41,34.83 v74.44,26.8 | v91.06,18 87.95,18 v81.09,24.86
EPD_BUSY  (via drill 0.3)
  Top 0.15: v84.55,13.5 85.52,14.47 85.52,15.37 J1.9 | v24.38,11.36 21.68,14.06 21.68,21.68 TP9.TP 23.2,23.27 v11.29,35.18 | v11.29,48.41 11.29,53.95 10.11,55.12 10.11,64.75 U2.26
  Bottom 0.15: v84.55,13.5 84.35,13.5 82.2,11.36 v24.38,11.36 | v11.29,35.18 v11.29,48.41
EPD_CS  (via drill 0.3)
  Top 0.15: 24.72,32.69 24.72,20.22 23.27,18.77 TP10.TP | 24.72,32.69 24.72,42.38 20.29,46.81 20.29,47.3 U2.11 | v77.01,14.54 78.25,13.3 82.34,13.3 84.07,15.03 84.07,15.37 J1.12 | D6.2 51.59,37.88 52.42,37.88 53.12,38.57 54.22,38.57 54.36,38.43 54.36,33.66 v54.29,33.66 54.08,33.66 53.53,33.1 R9.1 53.46,33.1 52.98,33.59 51.31,33.59 50.14,32.41 47.44,32.41 47.16,32.69 24.72,32.69
  Bottom 0.15: v77.01,14.54 65.37,14.54 54.29,25.62 v54.29,33.66
EPD_DC  (via drill 0.3)
  Top 0.15: v84.55,14.13 84.55,15.37 J1.11 | v25.69,11.84 23.06,14.47 TP11.TP 22.99,14.54 21.95,15.58 21.95,19.18 24.45,21.68 24.45,41.9 22.99,43.35 16.14,43.35 12.67,46.81 12.67,47.3 U2.5
  Bottom 0.15: v84.55,14.13 82.27,11.84 v25.69,11.84
EPD_RST  (via drill 0.3)
  Top 0.15: v85.45,16.2 85.11,15.86 85.11,15.44 J1.10 | v109.83,21.47 110.8,22.44 TP12.TP | v17.31,63.64 16.48,64.47 16.48,64.75 U2.21 | v98.27,46.74 v86.56,58.45
  Bottom 0.15: 98.27,16.2 104.57,16.2 v109.83,21.47 | 98.27,16.2 v85.45,16.2 | v17.31,63.64 20.08,66.41 78.6,66.41 v86.56,58.45 | 98.27,16.2 v98.27,46.74
FLASH_CS
  Top 0.15: D9.2 48.06,37.6 49.38,36.29 49.38,34.07 48.34,33.03 48.06,33.03 R5.1 47.99,32.96 35.59,32.96 21.54,47.02 21.54,47.3 U2.12 21.54,47.37 21.54,47.58 31.58,57.62 U1.1
GDR
  Top 0.15: 71.05,19.88 71.05,19.32 R4.1 | 71.05,19.88 71.05,29.36 74.37,32.69 87.12,32.69 89.33,30.47 89.33,25.83 88.5,25 88.5,20.5 89.06,19.94 89.06,15.44 J1.2 | 71.05,19.88 69.11,19.88 66.06,16.83 66.06,16.69 Q3.1
GND  (via drill 0.3)
  Top 0.15: 115.68,39.72 115.16,40.23 R1_PWRUSB.1 115.09,40.23 v106.58,40.23 | 115.68,39.72 117.59,37.81 117.86,37.81 C1_BAT1.2 | 120.29,41.27 117.24,41.27 115.68,39.72 | 120.29,41.27 120.98,41.27 IC4.2 | 120.29,41.27 120.29,42.66 124.17,46.54 124.72,46.54 R2_BAT.1 124.79,46.6 131.44,46.6 132.13,47.3 132.13,49.65 | C1_BAT.2 116.41,51.8 116.62,51.8 117.72,52.91 124.51,52.91 126.38,51.04 126.66,51.04 MCP73831.2 126.73,50.97 130.61,50.97 131.92,49.65 132.13,49.65 | C4_USB.2 152.14,46.19 152.14,47.44 C5_USB.2 152.07,47.51 152.07,49.93 151.31,50.69 151.1,50.69 D1.2 | D1.2 150.97,50.69 150.83,50.83 148.4,50.83 R2-USB.2 148.33,50.9 147.36,50.9 141.24,57.03 | TP4.TP 142.93,62.67 142.93,57.96 TP5.TP 142.86,57.89 142.1,57.89 141.24,57.03 | C3.- 127.35,41.76 130.54,41.76 C1_BAT2.2 130.54,41.83 130.54,44.18 134.48,48.13 134.48,49.65 | U4.9 135.45,52.77 135.45,52.63 134.9,52.08 134.55,52.08 U4.4 134.48,52.01 134.48,49.65 | U4.9 135.45,52.84 135.45,52.98 134.9,53.53 134.55,53.53 U4.1 134.41,53.53 133.44,54.5 130.88,54.5 C2_BAT.2 | U4.9 135.45,52.56 136.42,52.56 U4.6 136.49,52.56 136.77,52.56 141.24,57.03 | 134.48,49.65 132.13,49.65 | C2.2 158.58,8.24 C1.2 157.54,8.31 157.54,9.7 | 157.54,9.7 157.54,10.39 SENSOR2.7 157.54,10.46 157.54,10.73 158.03,11.22 158.58,11.22 159.07,10.73 159.07,10.46 SENSOR2.5 | 157.54,9.7 156.44,9.7 156.23,9.9 156.23,11.36 156.64,11.77 156.64,13.37 SENSOR2.1 156.71,13.43 156.71,14.54 159.97,17.8 164.47,17.8 J3.1 164.54,17.87 164.81,17.87 165.44,18.49 165.44,49.17 J2.MP3 | 164.54,57.82 164.54,58.93 165.02,59.42 J2.MP4 165.09,59.42 168.97,59.42 J2.MP2
  Top 0.15: 164.54,57.82 164.54,57.69 J2.A12 164.54,57.62 164.54,57.41 J2.B1 164.47,57.34 158.03,57.34 151.38,50.69 D1.2 | R2-USB1.1 155.4,51.38 164.4,51.38 164.47,51.31 J2.B12 164.54,51.24 164.54,50.97 J2.A1 164.54,50.9 165.02,50.41 | 165.02,50.41 165.02,49.24 J2.MP3 | J2.MP1 168.97,49.24 165.09,49.24 J2.MP3 | 164.54,57.82 165.85,57.82 166.2,57.48 166.2,51.18 165.44,50.41 165.02,50.41 | v50.69,36.22 51.45,36.22 51.52,36.29 D6.1 51.59,36.36 53.6,36.36 D8.1 | D9.1 48.06,36.15 v48.89,36.15 48.68,36.08 48.68,33.79 48.54,33.66 47.51,33.66 42.66,38.5 42.66,55.05 42.03,55.68 37.81,55.68 U1.9 37.74,55.68 35.94,53.88 33.93,53.88 U1.4 33.79,53.81 33.38,53.39 | 33.38,53.39 33.38,48.96 34.07,48.27 34.07,48.06 D12.1 | 71.5,16.1 71.19,16.41 70.08,16.41 69.46,15.79 C7.2 69.39,15.72 68.49,14.82 68.49,13.3 R2.1 68.49,13.23 69.11,12.6 69.11,11.49 68.77,11.15 65.65,11.15 64.89,11.91 64.89,12.12 SJ1.1 | 71.5,16.1 74.65,12.95 77.01,12.95 J1.MP2 | 85.39,16.9 82.68,16.9 81.58,15.79 81.58,15.44 J1.17 81.51,15.37 81.51,14.96 81.02,14.47 77.7,14.47 75.48,16.69 v75.48,20.22 74.31,21.4 74.24,21.4 | 85.39,16.9 86.01,16.27 86.01,15.44 J1.8 | 85.39,16.9 85.39,16.97 85.87,17.45 85.87,20.98 EPD_C7.1 85.94,21.05 87.53,21.05 EPD_C6.1 87.67,20.98 87.67,20.71 v88.16,20.22 | v77.49,20.22 77.49,20.91 EPD_C12.1 | v78.53,20.22 78.53,20.43 79.01,20.91 EPD_C11.1 | EPD_C8.1 84.14,21.05 84.14,21.19 84.83,21.88 84.83,22.71 84.62,22.92 83.58,22.92 83.1,22.44 83.1,21.68 82.48,21.05 EPD_C9.1 82.41,20.98 80.81,20.98 EPD_C10.1 80.75,20.91 80.47,20.64 v80.47,20.22 | 74.24,21.4 71.05,18.21 71.05,18 R4.2
  Top 0.15: 74.24,21.4 74.24,22.44 D11.1 74.24,22.51 73.61,23.13 73.61,25 EPD_C1.1 73.54,25.07 72.3,25.07 EPD_C2.1 72.3,25.14 71.61,25.83 71.61,26.73 72.16,27.29 v72.16,29.85 | v71.53,16.2 71.53,16.14 71.5,16.1 | C8.2 87.95,51.52 89.47,51.52 90.37,52.42 C10_SUPERCAP.1 90.23,52.22 91.34,51.11 91.34,49.51 88.99,47.16 86.08,47.16 | 86.08,47.16 83.17,47.16 81.58,48.75 81.58,50.48 U3.13 | 90.58,19.88 90.58,26.11 94.32,29.85 94.32,32.06 | 90.58,19.88 90.58,12.95 J1.MP1 | 94.32,32.06 92.17,34.21 86.08,34.21 | 86.08,34.21 83.52,34.21 D3.1 | v89.4,20.22 89.26,20.36 89.26,20.91 EPD_C5.1 | v90.51,19.88 90.58,19.88 | 86.08,34.21 86.08,47.16 | C5.2 67.59,108.65 66.97,108.65 65.86,107.55 RESET_BUTTON.2 65.79,107.61 62.39,107.61 RESET_BUTTON.1 62.33,107.61 61.35,107.61 61.01,107.96 53.39,107.96 53.18,107.75 53.12,107.75 | 51.87,106.51 51.87,100.69 C_DELAY.2 51.8,100.69 v50.97,100.69 | 51.87,106.51 50.9,107.48 CHANGE_BUTTON.2 50.83,107.48 47.37,107.48 CHANGE_BUTTON.1 | 53.12,107.75 52.49,108.38 52.49,108.58 C10.2 | 53.12,107.75 53.12,106.85 52.77,106.51 51.87,106.51 | C6.2 27.56,108.65 v28.18,108.03 37.6,98.61 47.3,98.61 IC1.3 47.37,98.61 v48.89,98.61 | U2.29_3 12.05,55.82 13.23,55.82 U2.29_6 13.3,55.82 14.47,55.82 U2.29_9 14.54,55.75 14.54,54.57 U2.29_8 14.54,54.5 14.54,53.32 U2.29_7 14.47,53.32 13.3,53.32 U2.29_4 13.23,53.32 12.12,53.32 U2.29_1 12.05,53.32 12.05,54.5 U2.29_2 | U2.29_5 13.23,54.5 12.12,54.5 U2.29_2 | 7.55,54.02 7.55,58.66 9,60.11 9,63.09 7.55,64.54 7.55,64.75 U2.28 7.48,64.82 7.48,76.17 6.79,76.87 | 7.55,54.02 7.55,47.37 U2.1 | v11.22,54.64 11.29,54.57 11.98,54.57 U2.29_2
  Top 0.15: 7.55,54.02 v10.6,54.02 | C9.2 8.1,100.83 7.34,100.83 2.22,95.7 J4.G4 2.22,95.63 2.22,95.29 4.64,92.86 4.78,92.86 J4.P6 4.64,92.8 1.18,89.33 1.18,82.55 J4.G3 1.18,82.48 6.79,76.87 | 6.79,76.87 15.37,85.45 J4.G1 15.44,85.52 15.44,86.56 16.2,87.32 16.2,90.37 15.44,91.13 J4.G2 15.37,91.2 14.13,92.45 14.13,99.03 D10.1 14.13,99.1 22.3,107.27 22.3,107.55 BOOT_BUTTON.1 22.37,107.61 25.76,107.61 BOOT_BUTTON.2 25.83,107.55 26.59,106.78 v26.73,106.78 | v32.96,53.88 33.38,53.46 33.38,53.39 | v102.56,40.23 94.39,32.06 94.32,32.06
  Bottom 0.15: v48.89,36.15 50.62,36.15 v50.69,36.22 65.79,36.22 v72.16,29.85 | v80.47,20.22 v78.53,20.22 v77.49,20.22 v75.48,20.22 75.48,20.15 v71.53,16.2 | v90.51,19.88 90.16,20.22 v89.4,20.22 v88.16,20.22 | v48.89,98.61 v50.97,100.69 | v10.6,54.02 v11.22,54.64 11.22,55.12 20.15,64.06 20.43,64.06 30.61,53.88 v32.96,53.88 | v28.18,108.03 27.98,108.03 v26.73,106.78 | v102.56,40.23 v106.58,40.23
  pour Top: -9.27,146.32 -11.56,144.04 -11.58,144.02 -12.42,144.02 -12.42,-11.27 -1.87,-21.82 205.97,-21.82 223.12,-4.67 223.12,138.97 215.77,146.32
  pour Bottom: -16.62,148.79 -16.62,-18.52 -9.74,-11.64 -9.72,-11.62 237.42,-11.62 237.42,144.07 229.57,151.92 -13.87,151.92 -17.16,148.63 -16.75,148.86 -16.74,148.86 -16.73,148.87 -16.72,148.87 -16.72,148.87 -16.72,148.88 -16.7,148.88 -16.69,148.88 -16.69,148.88 -16.68,148.88 -16.67,148.87 -16.66,148.87 -16.66,148.87 -16.66,148.86 -16.65,148.86 -16.64,148.85 -16.64,148.85 -16.64,148.84 -16.63,148.83 -16.63,148.82 -16.63,148.82 -16.62,148.82 -16.62,148.8 -16.62,148.79
GPIO8
  Top 0.15: R1.2 21.88,44.11 18.97,47.02 U2.10
I2C_PW  (via drill 0.3)
  Top 0.3: SENSOR2.6 158.38,10.39 158.38,10.04 159.97,8.45 R1-PINH.2 160.04,8.31 158.72,6.99 C2.1 158.58,6.92 157.41,6.92 C1.1 157.2,6.92 155.88,6.92 R2-PINH.2 155.74,6.99 152.35,10.39 64.82,10.39 44.87,30.33 v44.87,32.2 | v21.54,60.39 21.54,64.75 U2.17
  Bottom 0.3: v21.54,60.39 21.54,58.24 44.87,34.9 v44.87,32.2
INT_RTC
  Top 0.15: U2.8 16.48,47.37 16.48,47.58 28.53,59.62 74.65,59.62 79.22,64.19 83.65,64.19 83.79,64.06 83.79,61.84 R1-PINH1.1 83.72,61.77 83.72,61.08 82.89,60.25 82.89,59.9 U3.3 82.89,59.83 82.89,59.21 84.14,57.96 86.63,57.96 91.34,53.25 91.34,53.05 112.05,32.34 112.05,22.09 117.38,16.76 118.42,16.76 119.11,17.45 119.11,18.56 117.93,19.74 117.93,22.44 TP15.TP
IO/BOOT
  Top 0.15: R_BOOT.1 20.57,107.55 20.71,107.55 22.3,109.14 BOOT_BUTTON.4 22.37,109.14 25.76,109.14 BOOT_BUTTON.3 25.83,109.14 26.73,108.24 26.73,108.17 27.49,107.41 C6.1 27.49,107.34 27.49,106.92 24.1,103.53 24.1,64.82 U2.15
IO/CHANGE  (via drill 0.3)
  Top 0.15: C10.1 52.42,107.34 52.42,107.48 50.9,109 CHANGE_BUTTON.3 50.83,109 47.37,109 CHANGE_BUTTON.4 47.3,109 46.4,108.1 46.4,108.03 45.64,107.27 R_CHANGE.1 45.57,107.13 48.2,104.5 v48.2,100.69 | v14.54,63.71 13.92,64.33 13.92,64.75 U2.23
  Bottom 0.15: v14.54,63.71 14.54,65.65 48.2,99.31 v48.2,100.69
MISO  (via drill 0.3)
  Top 0.15: D12.2 34.14,49.51 34.76,48.89 34.76,47.44 34.62,47.3 33.52,47.3 32.69,48.13 32.41,48.13 R8.1 32.34,48.2 30.19,48.2 | 31.96,54.19 29.64,51.87 29.64,48.75 30.19,48.2 | 31.96,54.19 33.86,56.09 33.86,56.3 U1.2 | 9.7,65.93 8.86,65.09 8.86,64.82 U2.27 | v20.22,65.93 9.7,65.93 | 31.96,54.19 v31.23,54.91 | v6.51,92.52 5.19,93.83 5.05,93.83 J4.P7 | v9.7,66 9.7,65.93 | v19.32,26.45 16.41,23.55 TP6.TP | v30.19,48.13 30.19,48.2
  Bottom 0.15: v31.23,54.91 v20.22,65.93 | v6.51,92.52 6.51,87.95 9.7,84.76 v9.7,66 | v19.32,26.45 19.32,37.26 v30.19,48.13
MOSI  (via drill 0.3)
  Top 0.15: v83.1,16.41 83.1,15.44 J1.14 | v73.47,21.74 72.78,22.44 D11.2 | R7.1 66.69,14.13 v66.69,15.03 66.13,15.03 v49.44,31.72 | v24.86,47.02 34.83,47.02 41.62,53.81 U1.5 | v16,46.19 15.17,47.02 U2.7 | v4.29,88.78 4.99,89.47 J4.P3 | v8.52,60.25 v7.27,61.49 | v16.34,22.09 16.34,19.04 TP7.TP
  Bottom 0.15: v83.1,16.41 83.1,19.67 81.72,21.05 81.72,23.68 81.02,24.38 75.76,24.38 73.47,22.09 v73.47,21.74 73.41,21.74 v66.69,15.03 | v24.86,47.02 16.83,47.02 16.17,46.36 | 16.17,46.36 v16,46.19 16,46.12 16.34,45.77 16.34,25.97 | v4.29,88.78 4.29,68 7.27,65.03 v7.27,61.49 | v8.52,60.25 8.52,54.02 16.17,46.36 | 16.34,25.97 v16.34,22.09 | v49.44,31.72 44.74,31.72 42.52,33.93 27.42,33.93 19.46,25.97 16.34,25.97
N$1
  Top 0.15: R2-USB1.2 155.4,52.77 163.64,52.77 163.91,53.05 164.47,53.05 J2.A5
N$2
  Top 0.15: 118.94,38.33 117.24,40.03 D2.1 | 118.94,38.33 119.18,38.09 119.18,37.81 C1_BAT1.1 | 121.67,41.69 121.67,40.93 121.53,40.79 121.47,40.79 121.05,40.37 IC4.3 120.98,40.37 118.94,38.33 | 121.67,41.69 121.05,42.31 IC4.1 | Q1.2 133.38,48.2 132.41,47.23 132.41,47.16 128.25,43 123.06,43 121.74,41.69 121.67,41.69
N$3
  Top 0.15: R1_BAT.2 119.94,50.21 120.15,50.21 120.77,49.58 122.43,49.58 123.4,50.55 125.97,50.55 126.45,50.07 126.66,50.07 MCP73831.1
N$4
  Top 0.15: CHG_LED.C 120.08,51.73 120.08,51.38 121.19,50.28 R1_BAT.1
N$5  (via drill 0.3)
  Top 0.15: v149.44,49.65 148.4,49.65 R2-USB.1 | v163.5,55.61 163.91,56.02 164.47,56.02 J2.B5
  Bottom 0.15: v149.44,49.65 157.54,49.65 v163.5,55.61
N$6
  Top 0.15: R2_BAT.2 124.72,47.92 124.72,49.38 124.1,50 MCP73831.5
N$7
  Top 0.15: C4.1 93.63,30.26 92.24,30.26 92.03,30.05 D4.1 91.96,30.05 89.06,32.96 83.45,32.96 82.2,34.21 79.98,34.21 D3.2
N$8
  Top 0.15: J1.18 81.09,15.44 81.09,16.83 85.25,20.98 85.25,21.47 85.52,21.74 86.98,21.74 87.53,22.3 EPD_C6.2
N$9
  Top 0.15: C_DELAY.1 51.87,99.37 51.31,99.37 50.21,100.48 IC1.5
N$10
  Top 0.15: J1.20 80.12,15.44 80.12,17.59 83.45,20.91 83.45,21.68 84.07,22.3 EPD_C8.2
N$11  (via drill 0.3)
  Top 0.15: v83.52,19.88 80.61,16.97 80.61,15.44 J1.19 | v86.77,22.23 86.01,22.23 85.94,22.3 EPD_C7.2
  Bottom 0.15: v83.52,19.88 85.52,19.88 87.88,17.52 91.2,17.52 91.55,17.87 91.55,19.46 88.78,22.23 v86.77,22.23
N$12  (via drill 0.3)
  Top 0.15: v86.01,14.61 87.6,14.61 88.02,15.03 88.02,15.37 J1.4 | v75.9,23.89 75.48,23.89 74.24,25.14 74.24,25.62 73.61,26.25 EPD_C1.2
  Bottom 0.15: v86.01,14.61 84.28,14.61 81.44,17.45 81.44,23.55 81.09,23.89 v75.9,23.89
N$13
  Top 0.15: J1.22 79.08,15.44 79.08,19.88 79.78,20.57 79.78,21.54 80.47,22.23 80.75,22.23 EPD_C10.2
N$14  (via drill 0.3)
  Top 0.15: v87.53,20.22 87.53,15.44 J1.5 | v81.44,26.32 81.44,31.99 81.02,32.41 78.39,32.41 EPD_C2.2
  Bottom 0.15: v81.44,26.32 v87.53,20.22
N$15
  Top 0.15: J1.24 78.05,15.44 78.05,20.36 78.18,20.5 78.18,21.54 77.49,22.23 EPD_C12.2
N$16
  Top 0.15: SENSOR2.8 156.71,11.43 157.47,12.19 157.47,13.37 SENSOR2.2
N$19
  Top 0.15: D7.1 83.17,63.43 83.17,61.77 82.34,60.94 82.34,49.03 83.52,47.85 R_CAPACITOR.1
PREVGH
  Top 0.15: J1.21 79.64,15.44 79.64,20.01 80.05,20.43 80.05,21.4 80.33,21.68 81.78,21.68 82.41,22.3 EPD_C9.2 82.48,22.37 86.36,26.25 88.43,26.25 D5.1
PREVGL
  Top 0.15: J1.23 78.53,15.37 78.53,15.03 78.25,14.75 77.84,14.75 76.8,15.79 76.8,22.64 77.01,22.85 78.46,22.85 79.01,22.3 EPD_C11.2 79.08,22.3 79.64,22.85 81.02,22.85 88.16,29.98 88.43,29.98 D4.2
RESE
  Top 0.15: J1.3 88.5,15.37 88.5,14.96 86.56,13.02 77.91,13.02 73.54,17.38 70.5,17.38 70.29,17.59 70.29,18.63 69.67,19.25 R3.2 69.67,19.18 67.38,16.9 67.38,16.69 Q3.2
RESE'
  Top 0.15: 67.8,11.98 66.55,11.98 66.41,12.12 SJ1.2 | 67.8,11.98 68.42,11.98 R2.2 | 67.8,11.98 67.8,15.23 69.6,17.04 69.6,17.94 R3.1
RESET  (via drill 0.3)
  Top 0.15: RESET_BUTTON.4 62.39,109.14 65.79,109.14 RESET_BUTTON.3 65.86,109.14 66,109.28 68.14,109.28 68.35,109.07 68.35,108.24 67.66,107.55 67.66,107.41 C5.1 67.59,107.34 67.1,107.34 66.62,106.85 61.01,106.85 60.52,107.34 R_RESET.1 60.45,107.34 v54.29,101.17 | v47.71,101.17 47.37,100.83 47.37,100.55 IC1.1 | v10.11,53.53 10.11,47.37 U2.3
  Bottom 0.15: v54.29,101.17 v47.71,101.17 47.71,101.11 10.11,63.5 v10.11,53.53
RTC_RST  (via drill 0.3)
  Top 0.15: v26.04,61.29 22.78,64.54 22.78,64.75 U2.16 | v80.47,61.29 81.51,60.25 81.51,59.9 U3.4
  Bottom 0.15: v80.47,61.29 v26.04,61.29
RX
  Top 0.15: U2.24 12.67,64.75 12.67,64.47 17.24,59.9 51.59,59.9 77.14,85.45 TP2.TP
SCK  (via drill 0.3)
  Top 0.15: D10.2 12.53,99.1 12.12,99.51 10.32,99.51 R6.1 10.32,99.44 10.32,91.2 5.82,86.7 | 5.82,86.7 4.16,86.7 3.81,87.05 3.81,91 4.5,91.69 4.99,91.69 J4.P5 | v78.39,13.78 82.27,13.78 83.52,15.03 83.52,15.37 J1.13 | v17.59,13.78 17.11,13.78 16.41,14.47 TP8.TP | v42.38,33.45 42.38,54.08 41.69,54.78 41.69,55.05 U1.6 | v13.92,46.19 13.92,47.3 U2.6 | v5.82,78.46 5.82,86.7
  Bottom 0.15: 42.38,13.78 v17.59,13.78 17.59,13.85 13.92,17.52 13.92,34.69 | 42.38,13.78 v78.39,13.78 | 42.38,13.78 v42.38,33.45 | 13.92,34.69 v13.92,46.19 | v5.82,78.46 5.82,66.89 7.76,64.96 7.76,38.09 11.15,34.69 13.92,34.69
SCL  (via drill 0.3)
  Top 0.15: v155.88,9.35 155.88,8.24 R2-PINH.1 | v159,12.46 159,13.3 159.07,13.37 SENSOR2.4 | v137.25,53.67 137.25,53.53 136.84,53.12 136.49,53.12 U4.7 | v164.47,26.45 164.47,20.84 J3.4 | v18.63,63.64 17.73,64.54 17.73,64.75 U2.20 | v82.82,55.54 82.82,53.46 85.32,50.97 85.32,50.55 U3.16 85.39,50.97 v88.99,54.57
  Bottom 0.15: v155.88,9.35 v159,12.46 159,16.55 164.47,22.02 v164.47,26.45 v137.25,53.67 137.25,53.95 136.63,54.57 v88.99,54.57 | v18.63,63.64 19.32,63.64 20.01,64.33 21.19,64.33 31.09,54.43 33.73,54.43 34.83,55.54 v82.82,55.54
SDA  (via drill 0.3)
  Top 0.15: R1-PINH.1 160.11,7.06 160.11,7.27 160.73,7.89 160.73,10.11 158.38,12.46 158.38,13.37 SENSOR2.3 158.38,13.43 v158.38,15.58 | v136.49,54.08 136.49,53.6 U4.8 | v162.94,21.12 164.19,19.88 164.47,19.88 J3.3 | v20.98,62.46 20.77,62.46 18.97,64.26 18.97,64.75 U2.19 | v83.03,51.94 84.07,50.9 84.07,50.55 U3.15
  Bottom 0.15: 136.49,51.94 136.49,47.58 v162.94,21.12 162.94,21.05 158.38,16.48 v158.38,15.58 | 136.49,51.94 v136.49,54.08 | v20.98,62.46 20.98,62.26 28.67,54.57 28.67,52.28 29.02,51.94 v83.03,51.94 136.49,51.94
SRC  (via drill 0.3)
  Top 0.15: v92.8,30.75 93.63,31.58 C4.2 | v92.8,27.08 92.03,26.32 D5.2 | v70.57,22.58 66.76,18.77 Q3.3 | v78.81,28.88 79.36,29.43 L1.1 79.43,29.43 v80.95,29.43
  Bottom 0.15: v92.8,27.08 92.8,29.43 | 92.8,29.43 v92.8,30.75 | v70.57,22.58 72.5,22.58 v78.81,28.88 | v80.95,29.43 92.8,29.43
SS_SD  (via drill 0.3)
  Top 0.15: 51.31,38.85 54.36,38.85 54.78,38.43 54.78,33.24 54.02,32.48 52.98,32.48 52.49,32.96 51.87,32.96 R10.1 | 51.31,38.85 50.9,38.43 50.9,37.26 51.04,37.12 52.91,37.12 53.6,37.81 D8.2 | v10.6,48.48 11.29,47.78 11.29,47.37 U2.4 | v6.16,87.67 5.4,88.43 J4.P2 | 51.31,38.85 51.31,48.96 41.69,58.59 28.12,58.59 v22.58,53.05
  Bottom 0.15: v10.6,48.48 10.6,51.52 8.03,54.08 8.03,60.73 | 8.03,60.73 8.03,85.8 v6.16,87.67 | v22.58,53.05 9.97,53.05 9,54.02 9,60.39 8.66,60.73 8.03,60.73
TX  (via drill 0.3)
  Top 0.15: v11.98,63.71 11.36,64.33 11.36,64.75 U2.25 | v33.93,85.66 69.94,85.66 TP1.TP
  Bottom 0.15: v33.93,85.66 v11.98,63.71
USB_D+  (via drill 0.3)
  Top 0.15: v147.23,51.66 150.97,51.66 D1.1 | v29.15,52.42 24.1,47.37 U2.14
  Bottom 0.15: v147.23,51.66 139.95,51.66 136.56,55.05 34.76,55.05 32.13,52.42 v29.15,52.42
USB_D-  (via drill 0.3)
  Top 0.15: v134.97,49.03 149.44,49.03 150.13,49.72 150.97,49.72 D1.3 | v34.62,46.54 24.79,46.54 24.58,46.33 23.48,46.33 22.78,47.02 U2.13
  Bottom 0.15: v134.97,49.03 37.12,49.03 v34.62,46.54
VBAT
  Top 0.3: U4.3 U4.2 134.34,53.12 134,53.12 133.93,53.18 132.47,53.18 | 132.47,53.18 130.88,53.18 C2_BAT.1 130.74,53.12 129.64,52.01 126.73,52.01 MCP73831.3 126.59,52.08 125.34,53.32 105.47,53.32 84.35,74.44 84.35,85.25 TP3.TP | 132.47,53.18 132.47,50.34 Q1.3
VBUS  (via drill 0.3)
  Top 0.3: D1.5 153.53,50.62 153.11,50.62 152.63,50.14 152.63,48.27 153.32,47.58 C5_USB.1 153.46,47.44 153.46,46.19 C4_USB.1 153.53,46.05 153.53,45.43 | 153.53,45.43 153.53,43.28 153.67,43.14 PFMF.050.1.2 | MCP73831.4 124.03,51.94 123.89,51.8 121.53,51.8 CHG_LED.A 121.39,51.87 121.12,51.87 120.5,52.49 118.56,52.49 117.86,51.8 C1_BAT.1 117.72,51.73 117.72,51.24 121.74,47.23 | 121.74,47.23 125.34,47.23 126.31,48.2 131.51,48.2 Q1.1 131.57,48.06 v131.57,47.37 | 121.74,47.23 121.67,47.09 117.31,42.73 117.31,42.24 D2.2 117.17,42.1 116.69,41.62 115.16,41.62 R1_PWRUSB.2 115.02,41.48 v114.26,40.72 | v110.8,16.62 TP14.TP | v133.51,45.43 153.53,45.43
  Bottom 0.3: v110.8,16.62 110.8,37.26 v114.26,40.72 | v131.57,47.37 v133.51,45.43
VRTC
  Top 0.3: C10_SUPERCAP.2 90.37,50.28 90.3,50.21 87.95,50.21 C8.1 87.74,50.21 86.98,50.21 84.97,48.2 R_CAPACITOR.2 84.83,47.92 84.83,48.13 82.89,50.07 82.89,50.48 U3.14
VUSB
  Top 0.3: J2.A4 164.54,51.8 164.54,52.01 J2.B9 | J2.A9 164.54,56.85 164.54,56.58 J2.B4 164.68,56.51 165.23,56.51 165.72,56.02 165.72,52.63 165.16,52.08 164.68,52.08 J2.B9 | J2.B9 164.4,52.08 154.77,52.08 154.63,51.94 154.63,50.97 155.26,50.34 160.24,50.34 160.59,50 160.59,47.02 154.57,41 151.31,41 149.23,43.07 PFMF.050.1.1

## Text on the board
tPlace: Serial No